# Altium PCB head_control.PcbDoc
Units mm, origin at the board's own origin, x right, y up, seen from the top; angles counter-clockwise.
Board outline 45 x 35 mm, 2 copper layers (Top Layer, Bottom Layer), stack 1.5 mm thick; 12 components, 12 nets, 39 pads, 0 vias.
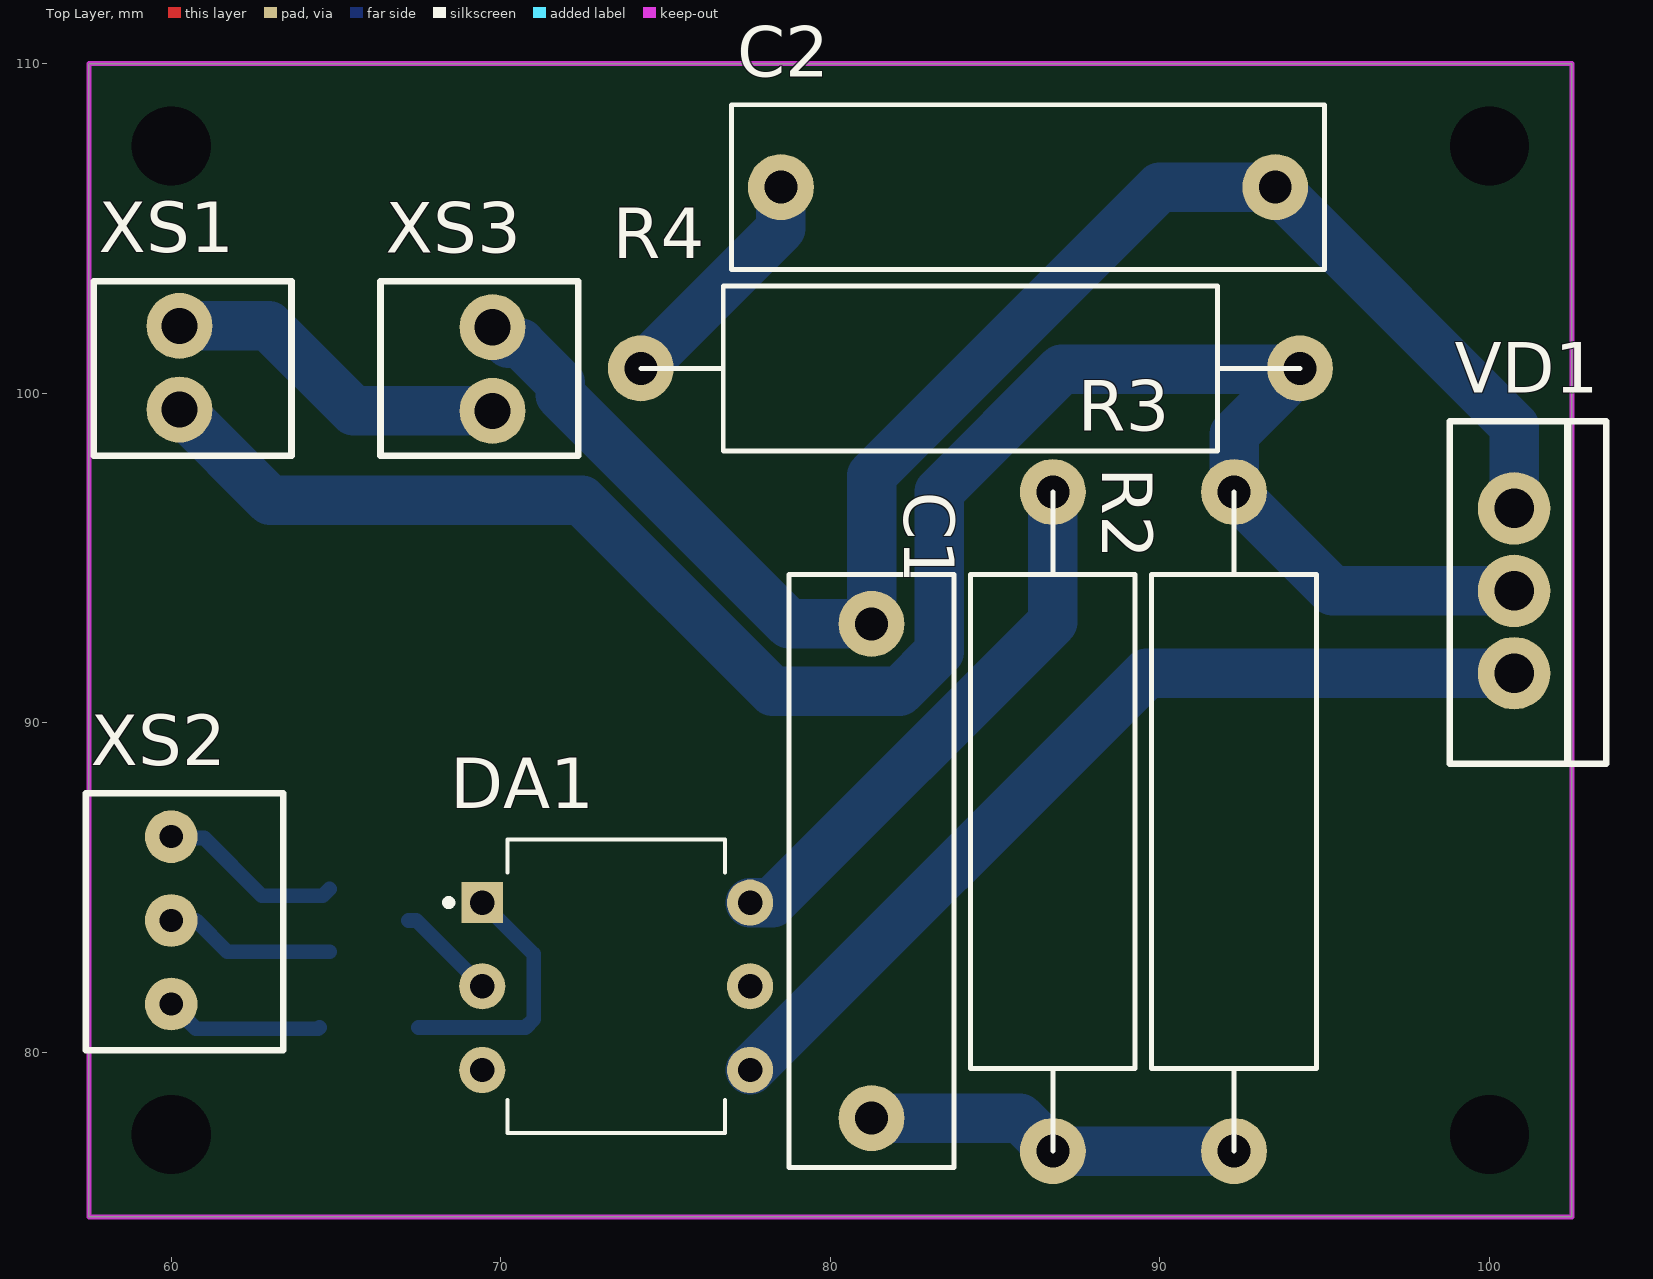
[diagram p0: Top Layer view]
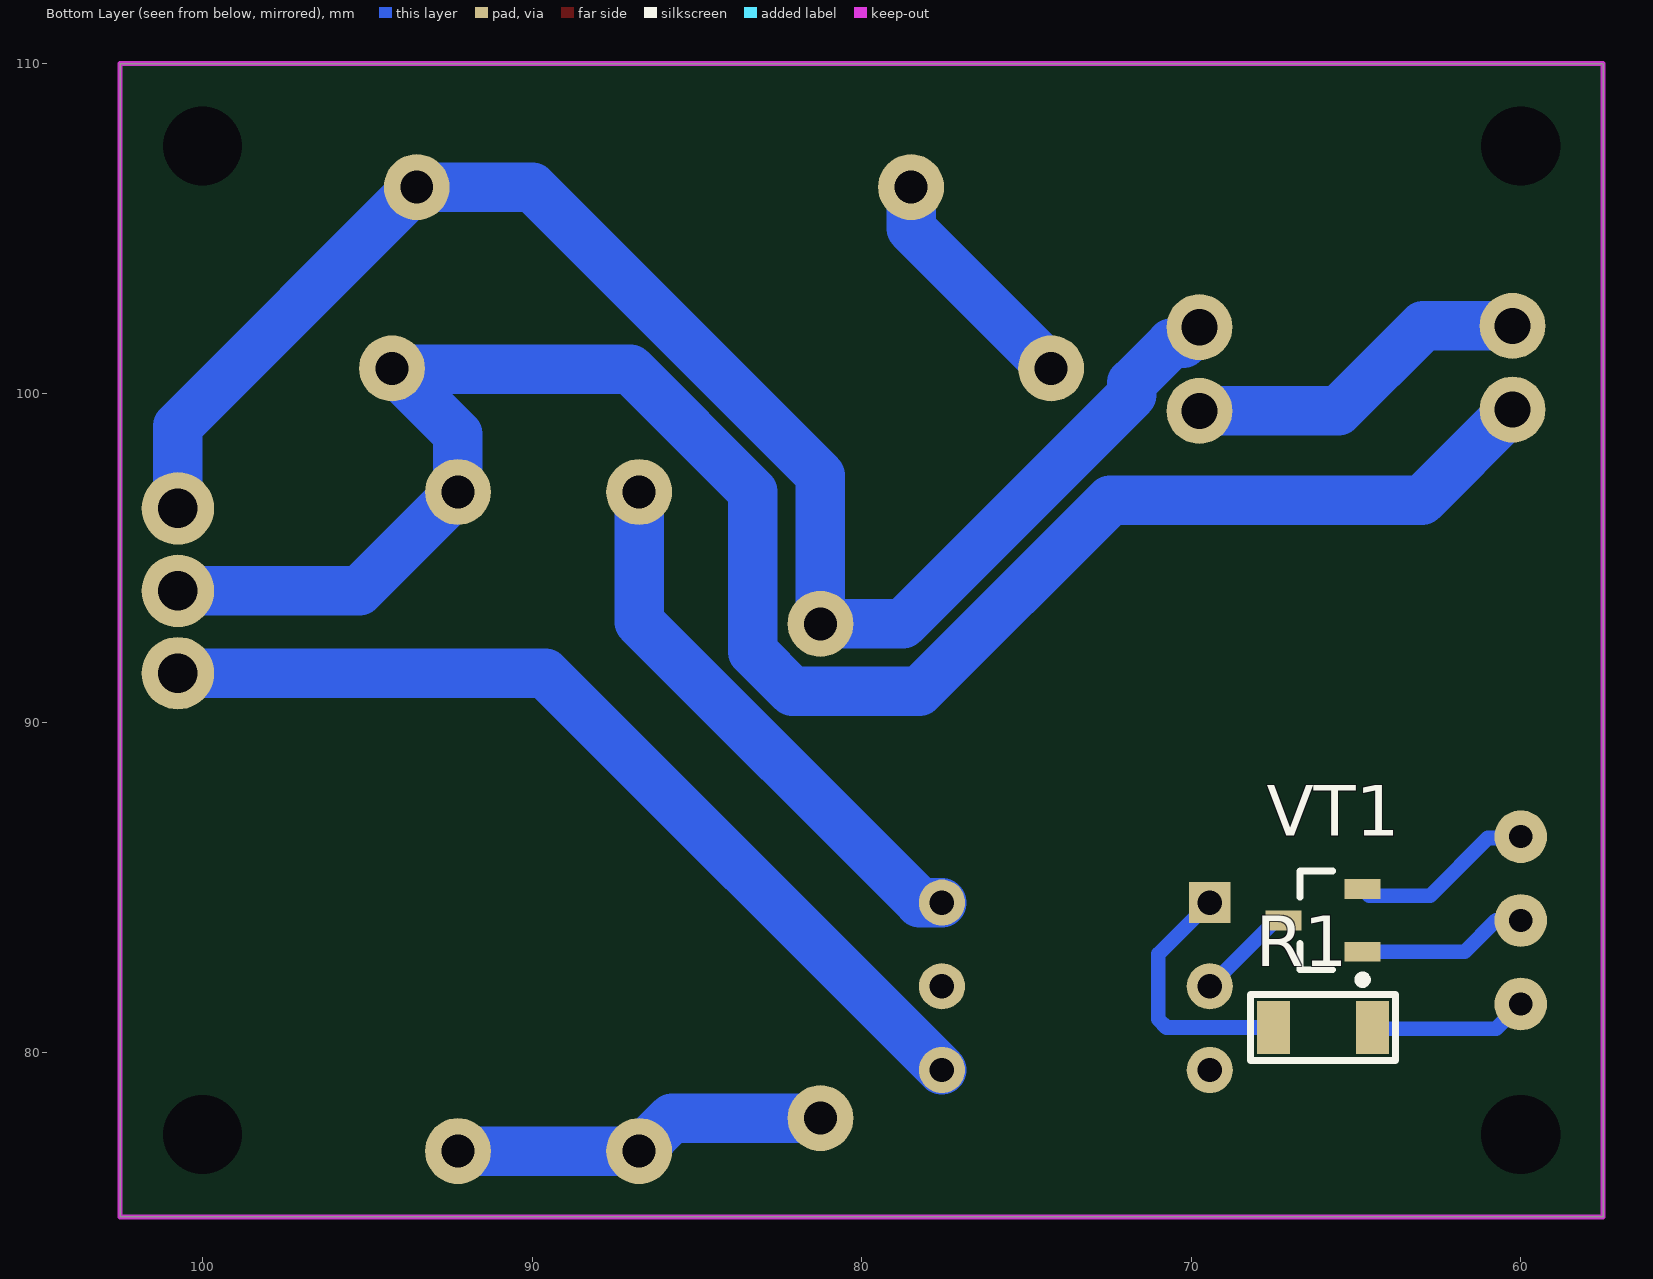
[diagram p1: Bottom Layer view, seen from below]
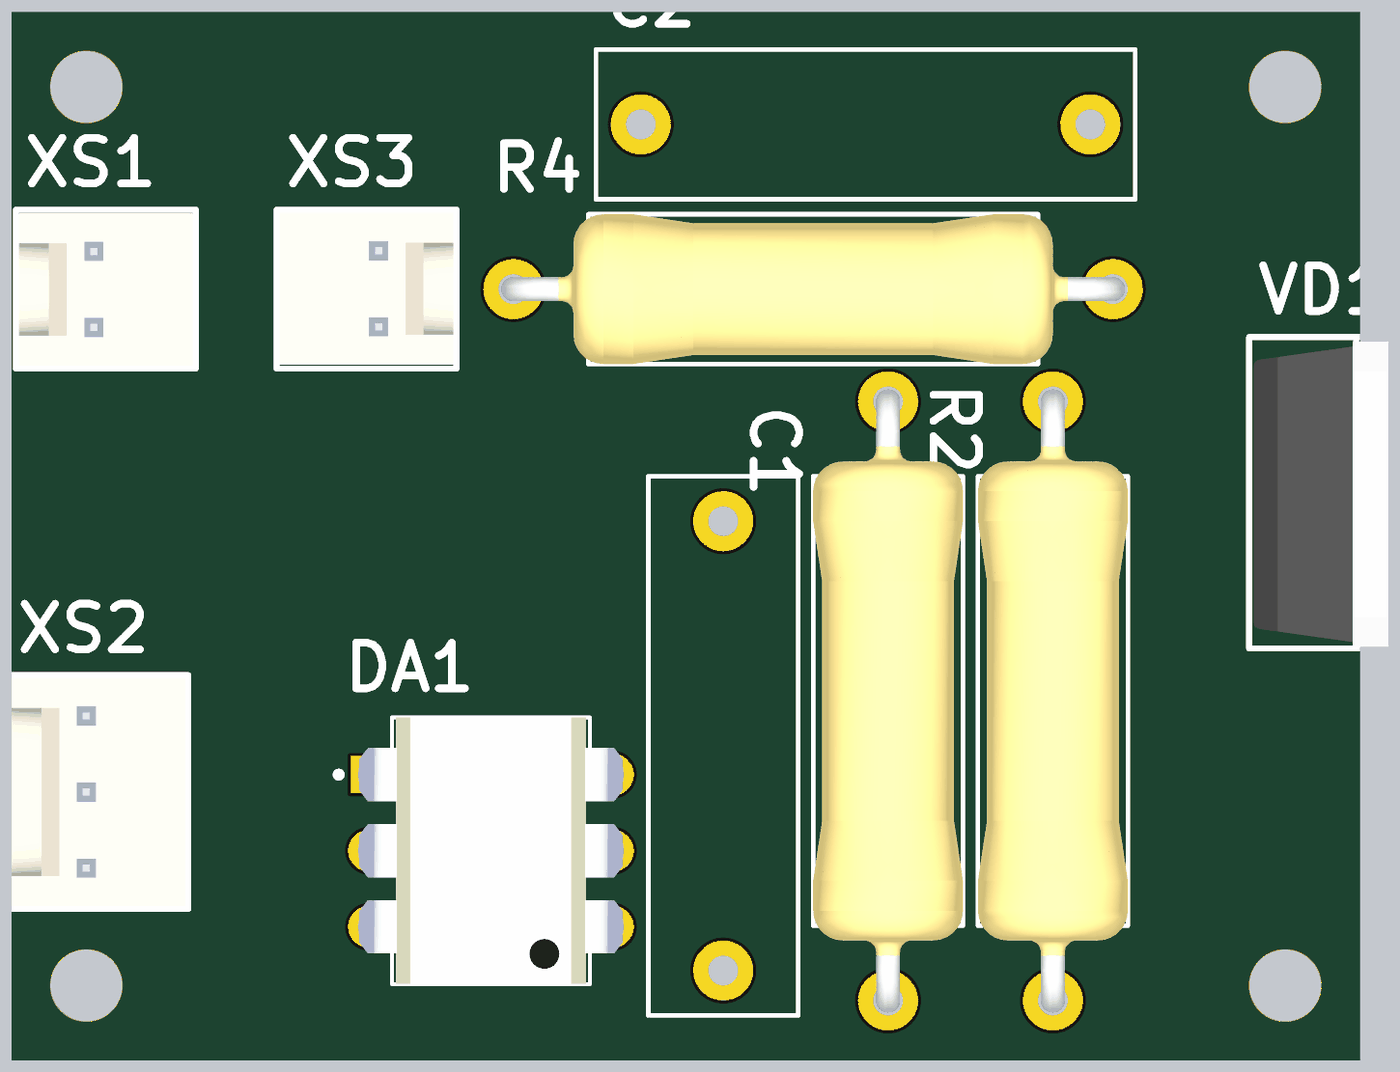
[diagram p2: 3D render of the assembled board from above, using the file's embedded part models]

## Layer stack, top to bottom
Top Layer: signal copper (thickness not stored)
Dielectric 1: dielectric 1.5, FR-4, Dk 4.8
Bottom Layer: signal copper (thickness not stored)

## Board outline
57.5,75 57.5,110 102.5,110 102.5,75

## Design rules (kind name [scope] priority, off if disabled: settings)
Clearance [All] p1: gap=0.3 ignorepadtopadclearanceinfootprint=FALSE except(0: Arc-Hole Track-Hole SMDPad-Hole THPad-Hole Via-Hole Fill-Hole Poly-Hole Region-Hole Text-Hole)
PolygonConnect [All] p1: connectstyle=Relief reliefconductorwidth=0.254 reliefentries=4 polygonreliefangle="90 Angle" airgapwidth=0.254
RoutingVias [All] p1: holewidth=0.711 width=1.27 viastyle="Through Hole" minholewidth=0.711 minwidth=1.27 maxholewidth=0.711 maxwidth=1.27
SolderMaskExpansion [All] p1: expansion=0.102
Width [All] p1: maxlimit=1.5 minlimit=0.45 preferedwidth=0.75 minimp=50.000000 maximp=50.000000 favimp=50.000000
30 further rules are at their usual default settings.

## Components (designator, comment, footprint, x,y, rotation, side; value= is the part's Value field where it differs from the comment)
C1 "10 нФ" B32652 81.25,85.5 r270 top
C2 "10 нФ" B32652 86,106.25 r180 top
DA1 "MOC3020M" DIP762W48P254L889H508Q6 73.5,82 r0 top
R1 "Res" "RES: 1206" 66,80.75 r180 bottom
R2 "Res" RESAD2000W80L1600D500_2W 86.75,87 r270 top
R3 "Res" RESAD2000W80L1600D500_2W 92.25,87 r90 top
R4 "Res" RESAD2000W80L1600D500_2W 84.25,100.75 r180 top
VD1 "BT137-600E" TO220 100.75,94 r270 top
VT1 "FDV303N" SOT23 66,84 r0 bottom
XS1 "XS?" "CON: WF-02" 60.25,99.5 r90 top
XS2 "XS?" "CON: WF-03" 60,81.46 r90 top
XS3 "X2" "CON: WF-02" 69.75,102 r270 top

## Footprints (in the part's own frame and the unit in brackets; to place one, negate y for a bottom-side part, rotate by r counter-clockwise, add the part's x,y. Pads: shape width x height; smd on the part's side, far side on the other; paste and mask are expansions set on the pad)
B32652 [mm]
  round 2 hole 1: 1(-7.5,0) 2(7.5,0)
  silkscreen extent -9,-2.5 9,2.5, body extent -9,-2.5 9,2.5, height 10.5
"CON: WF-02" [mm]
  round 2 hole 1.1: 1(0,0) 2(2.54,0)
  round 0.5 on Mech1: ""(-0.8,2)
  silkscreen extent -1.4,-3.4 3.9,2.6, body extent -1.3,-3.3 3.78,2.5, height 11.5
"CON: WF-03" [mm]
  round 1.6 hole 0.7: 1(0,0) 2(2.54,0) 3(5.08,0)
  round 0.5 on Mech1: ""(-0.8,2)
  silkscreen extent -1.4,-3.4 6.4,2.6, body extent -1.31,-3.3 6.31,2.5, height 11.5
DIP762W48P254L889H508Q6 [mm]
  rect 1.248x1.248 hole 0.74: 1(-4.064,2.54)
  round 1.4 hole 0.74: 2(-4.064,0) 3(-4.064,-2.54) 4(4.064,-2.54) 5(4.064,0) 6(4.064,2.54)
  silkscreen extent -5.18,-4.45 3.3,4.45, body extent -4.9,-4.45 4.9,4.45, height 5.46
"RES: 1206" [mm]
  rect 1x1.6 smd: 1(-1.5,0) 2(1.5,0)
  silkscreen extent -2.2,-1 2.2,1, body extent -1.65,-0.8 1.55,0.8, height 0.47
RESAD2000W80L1600D500_2W [mm]
  round 2 hole 1: 1(-10,0) 2(10,0)
  silkscreen extent -10,-2.5 10,2.5, body extent -10.4,-2.5 10.4,2.5, height 5
SOT23 [mm]
  rect 1.1x0.6 smd: 1(-1.2,0.95) 2(-1.2,-0.95) 3(1.2,0)
  round 0.5 on Mech1: ""(-0.9,1.1)
  silkscreen extent -1.32,-1.5 0.7,1.92, body extent -1.32,-1.52 1.32,1.52, height 1.12
TO220 [mm]
  round 2.2 hole 1.2: 1(-2.5,0) 2(0,0) 3(2.5,0)
  silkscreen extent -5.15,-1.95 5.25,2.8, body extent -5,-1.8 5.2,2.7, height 22.06

## Part data
C1 C2: library part C_const
DA1: library part opto_triak
VD1: library part triac
VT1: library part n-mosfet
XS1: library part X2, =address1=A3-XS1:1, =address2=A3-XS1:2, circuit1=~220В, circuit2=~220В
XS2: library part X3, =address1=A3-XS2:1, =address2=A3-XS2:2, =address3=A3-XS2:3, circuit1=VDD, circuit2=PWM, circuit3=GND
XS3: =address1=A3-XS3:1, =address2=A3-XS3:2, circuit1=HOT, circuit2=GROUND

## Free pads (board coordinates)
  round 0 hole 2.4: 2(60,107.5) 3(100,107.5) 4(100,77.5) 5(60,77.5)

## Nets (pads, with @x,y where several pads share a name; then routed paths per layer and width w, separated by ;. In a path a pad name is that pad's centre, name@x,y a point inside that pad or via, vN(x,y) a via of type N, cw(c..) or ccw(c..) an arc to the next point about the centre after c; other vN are vias at no path point)
NetC1_1: C1.1 C2.1 VD1.1 XS3.1 | length 48.6
  Bottom Layer w1.5: XS3.1 70.24,101.51 70.599,101.51 71.8,100.309 71.8,99.95 78.75,93 C1.1 81.25,97.5 90,106.25 C2.1 100.75,99 VD1.1
NetC1_2: C1.2 R2.2 R3.1 | length 11.4
  Bottom Layer w1.5: C1.2 85.75,78 R2.2 R3.1
NetC2_2: C2.2 R4.2 | length 7.3
  Bottom Layer w1.5: R4.2 78.5,105 C2.2
NetDA1_1: DA1.1 R1.1 | length 7.8
  Bottom Layer w0.45: R1.1 70.75,80.75 71,81 71,82.976 DA1.1
NetDA1_2: DA1.2 VT1.3 | length 3.1
  Bottom Layer w0.45: VT1.3 67.436,84 DA1.2
NetDA1_3: DA1.6 R2.1 | length 16.7
  Bottom Layer w1.5: DA1.6 78.235,84.54 86.75,93.055 R2.1
NetDA1_4: DA1.4 VD1.3 | length 28.2
  Bottom Layer w1.5: DA1.4 89.604,91.5 VD1.3
NetR1_2: R1.2 XS2.1 | length 4.8
  Bottom Layer w0.45: XS2.1 60.75,80.71 64.46,80.71 R1.2
NetR3_2: R3.2 R4.1 VD1.2 XS1.1 | length 58.7
  Bottom Layer w1.5: XS1.1 63,96.75 72.454,96.75 78.254,90.95 82.099,90.95 83.3,92.151 83.3,97.004 87.023,100.727 R4.1@94.227,100.727 ; R4.1 R4.1@94.227,100.727 ; VD1.2 95.25,94 R3.2 92.25,98.75 R4.1@94.227,100.727
NetVT1_1: VT1.1 XS2.2 | length 4.4
  Bottom Layer w0.45: XS2.2@60.75,84 61.7,83.05 VT1.1
NetVT1_3: VT1.2 XS2.3 | length 4.9
  Bottom Layer w0.45: XS2.3@60.71,86.5 61,86.5 62.75,84.75 64.6,84.75 VT1.2
NetXS1_2: XS1.2 XS3.2 | length 10.6
  Bottom Layer w1.5: XS1.2 62.96,102.04 65.54,99.46 XS3.2
pads on no net: DA1.3 DA1.5 VT1. XS1. XS2. XS3.

## Keep-outs
Keep-Out Layer:
  the board outline again, w0.15